# EAGLE board Final v5 (EAGLE 9.7.0)
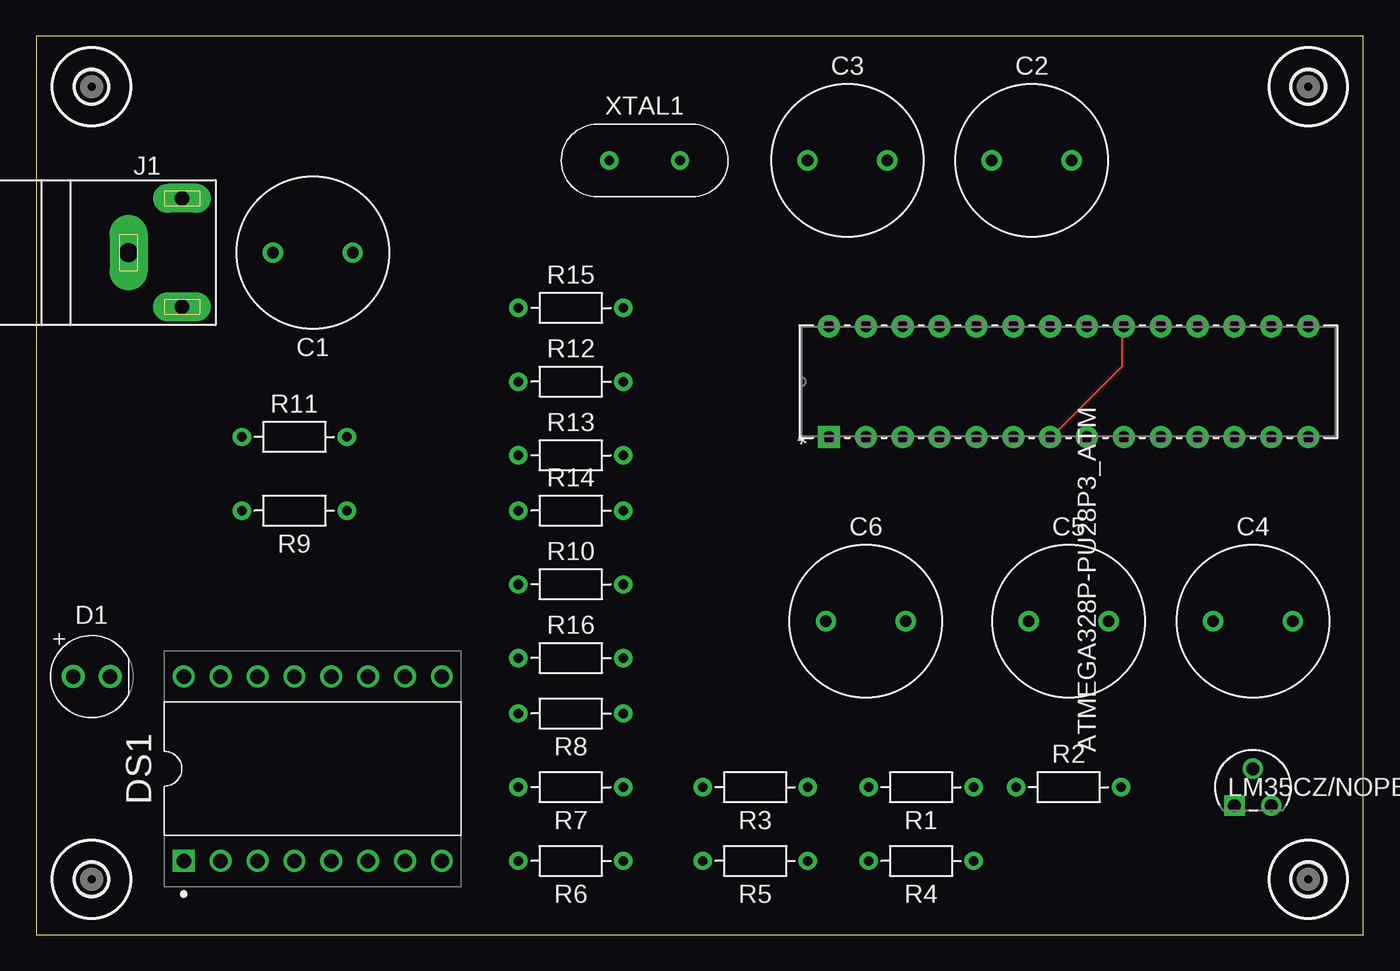
[diagram p0: board, top side]
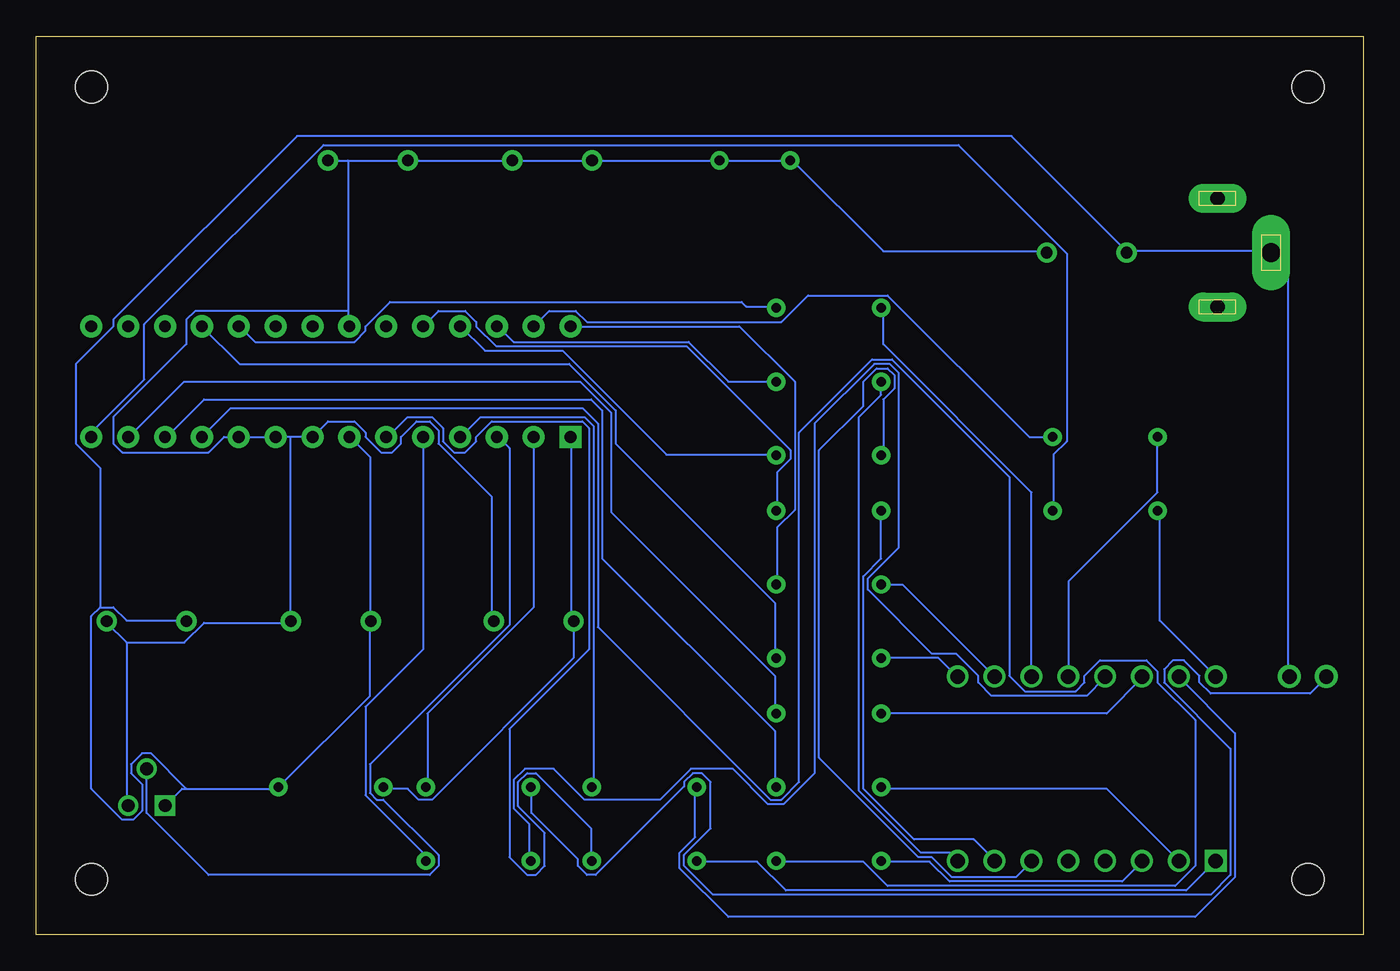
[diagram p1: board, bottom side, seen from below]

Size 91.42 x 61.9 mm. Coordinates in mm from the lower left corner, seen from the top.
Outline: 0,0 91.42,0 91.42,61.9 0,61.9 0,0
Copper layers (1*16): Top / Bottom
Stack-up Default Layer Stack: Top User Defined 0.035mm / Dielectric-1 User Defined 1.5mm / Bottom User Defined 0.035mm
Design rules "default": minimum track width 6mil, minimum drill 0.35mm, track to track 6mil, track to pad 6mil, pad to pad 6mil, via to via 6mil, smd to smd 6mil, copper to edge 40mil, drill to drill 6mil, minimum pad ring 10mil, minimum via ring 8mil, stop-mask expansion 4mil, vias tented up to drill 0mil, thermal gap 10mil

## Footprints (pad centres in the part's own frame; a part is rotated, then mirrored left to right if it is on the bottom)
CAPRD550W60D1025H1250B = drill 0.8 pad 1.4: 1 -2.75,0; 2 2.75,0
LEDGR254W60D565H860B_Y = drill 0.981 pad 1.581: 1 -1.27,0; 2 1.27,0
D*04-11SURKWA = drill 1 square: 1 0,0 | drill 1: 2 0,-2.54; 3 0,-5.08; 4 0,-7.62; 5 0,-10.16; 6 0,-12.7; 7 0,-15.24; 8 0,-17.78; 9 12.7,-17.78; 10 12.7,-15.24; 11 12.7,-12.7; 12 12.7,-10.16; 13 12.7,-7.62; 14 12.7,-5.08; 15 12.7,-2.54; 16 12.7,0
2,2 = hole 2.2: 0,0
PJRAN1X1U01X = drill 1.3 pad 2.6 long: 1 0,0 | drill 1 pad 2 long: 2 3.75,3.7; 3 -3.75,3.7
RESAD724W46L381D178B = drill 0.66 pad 1.26: 1 -3.62,0; 2 3.62,0
28P3_ATM = drill 0.813 pad 1.524 square: 1 0,0 | drill 0.813 pad 1.524: 2 0,-2.54; 3 0,-5.08; 4 0,-7.62; 5 0,-10.16; 6 0,-12.7; 7 0,-15.24; 8 0,-17.78; 9 0,-20.32; 10 0,-22.86; 11 0,-25.4; 12 0,-27.94; 13 0,-30.48; 14 0,-33.02; 15 7.62,-33.02; 16 7.62,-30.48; 17 7.62,-27.94; 18 7.62,-25.4; 19 7.62,-22.86; 20 7.62,-20.32; 21 7.62,-17.78; 22 7.62,-15.24; 23 7.62,-12.7; 24 7.62,-10.16; 25 7.62,-7.62; 26 7.62,-5.08; 27 7.62,-2.54; 28 7.62,0
Z03A = drill 0.889 pad 1.397 square: 1 -2.54,-2.54 | drill 0.889 pad 1.397: 2 -1.27,0; 3 0,-2.54
XTALRR488W45L1150T500H350B = drill 0.657 pad 1.257: 1 -2.44,0; 2 2.44,0

## Placement (x,y rotation side)
C1  [CAPRD550W60D1025H1250B]  19.05,46.99 180 top
C2  [CAPRD550W60D1025H1250B]  68.58,53.34 0 top
C3  [CAPRD550W60D1025H1250B]  55.88,53.34 0 top
C4  [CAPRD550W60D1025H1250B]  83.82,21.59 0 top
C5  [CAPRD550W60D1025H1250B]  71.12,21.59 0 top
C6  [CAPRD550W60D1025H1250B]  57.15,21.59 0 top
D1  [LEDGR254W60D565H860B_Y]  3.81,17.78 0 top
DS1  DA04-11SURKWA  [D*04-11SURKWA]  10.16,5.08 90 top
H1  MOUNT-HOLE2.2  [2,2]  87.63,58.42 0 top
H2  MOUNT-HOLE2.2  [2,2]  3.81,58.42 0 top
H3  MOUNT-HOLE2.2  [2,2]  3.81,3.81 0 top
H4  MOUNT-HOLE2.2  [2,2]  87.63,3.81 0 top
J1  PJRAN1X1U01X  [PJRAN1X1U01X]  6.35,46.99 270 top
R1  [RESAD724W46L381D178B]  60.96,10.16 180 top
R2  [RESAD724W46L381D178B]  71.12,10.16 0 top
R3  [RESAD724W46L381D178B]  49.53,10.16 180 top
R4  [RESAD724W46L381D178B]  60.96,5.08 180 top
R5  [RESAD724W46L381D178B]  49.53,5.08 180 top
R6  [RESAD724W46L381D178B]  36.83,5.08 180 top
R7  [RESAD724W46L381D178B]  36.83,10.16 180 top
R8  [RESAD724W46L381D178B]  36.83,15.24 180 top
R9  [RESAD724W46L381D178B]  17.78,29.21 180 top
R10  [RESAD724W46L381D178B]  36.83,24.13 0 top
R11  [RESAD724W46L381D178B]  17.78,34.29 0 top
R12  [RESAD724W46L381D178B]  36.83,38.1 0 top
R13  [RESAD724W46L381D178B]  36.83,33.02 0 top
R14  [RESAD724W46L381D178B]  36.83,29.21 0 top
R15  [RESAD724W46L381D178B]  36.83,43.18 0 top
R16  [RESAD724W46L381D178B]  36.83,19.05 0 top
U2  ATMEGA328P-PU28P3_ATM  [28P3_ATM]  54.61,34.29 90 top
U3  LM35CZ/NOPBZ03A  [Z03A]  85.09,11.43 0 top
XTAL1  HC49  [XTALRR488W45L1150T500H350B]  41.91,53.34 0 top

## Library data of the parts
C1 = Capacitor; CATEGORY: Capacitor
C2-C6 = Tutorial - Fusion 360; CATEGORY: Capacitor
D1 = Library
DS1 = Display_LED; CATEGORY: DISPLAY; COLOR: Hyper Red (AlGaInP); CONFIGURATION: Common Anode; DESCRIPTION: 10 mm (0.4 inch) Dual Digit Numeric Display in Common Anode Configuration; DIGIT: Dual Digit; MANUFACTURER: Kingbright; MPN: DA04-11SURKWA; OPERATING_TEMP: -40°C to +85 °C; PART_STATUS: Active; ROHS_COMPLIANT: COMPLIANT; SERIES: -; SUB-CATEGORY: LED; THERMALLOSS: 0.075 W; TYPE: 7 Segment
H1-H4 = holes
J1 = Connectors; CREATED_BY: PCBLayout.com; DIGIKEY_PART_NUMBER: PJRAN1X1U01X-ND; MANUFACTURER: Switchcraft Inc.; MPN: PJRAN1X1U01X
R1-R16 = Resistor; CATEGORY: Resistor; SUB-CATEGORY: Fixed
U2 = ATMega328P-PU; COPYRIGHT: Copyright (C) 2022 Ultra Librarian. All rights reserved.; MANUFACTURER_PART_NUMBER: ATMEGA328P-PU; MFR_NAME: Microchip
U3 = LM35CZNOPB; COPYRIGHT: Copyright (C) 2022 Ultra Librarian. All rights reserved.; MANUFACTURER_PART_NUMBER: LM35CZ/NOPB; MFR_NAME: Texas Instruments; TYPE: LM35CAZ
XTAL1 = Frequency-Source; CATEGORY: Frequency-Source; SUB-CATEGORY: Crystal-2Pin

## Nets
GND: C1.1 C2.1 C2.2 C3.1 C3.2 C4.2 C5.2 C6.2 U2.8 U2.9 U2.10 U2.22 U3.3 XTAL1.1 XTAL1.2
N$1: U2.3 U3.2
N$3: C6.1 R2.1 U2.1
N$4: R1.1 U2.2
N$5: D1.1 R1.2
N$7: C1.2 C4.1 C5.1 D1.2 J1.1 R2.2 U2.7 U2.20 U3.1
N$8: R3.1 U2.4
N$9: R4.1 U2.5
N$10: R5.1 U2.6
N$11: R6.1 U2.11
N$12: R7.1 U2.12
N$13: R8.1 U2.13
N$14: R9.1 U2.14
N$15: DS1.15 R3.2
N$16: DS1.13 R4.2
N$17: DS1.1 R5.2
N$18: DS1.3 R6.2
N$19: DS1.2 R7.2
N$20: DS1.14 R8.2
N$21: DS1.16 R9.2
N$22: DS1.10 R10.1
N$23: DS1.12 R11.1
N$24: DS1.8 R12.1
N$25: DS1.6 R13.1
N$26: DS1.7 R14.1
N$27: DS1.11 R15.1
N$28: DS1.9 R16.1
N$29: R10.2 U2.28
N$30: R11.2 U2.27
N$31: R12.2 U2.26
N$32: R13.2 U2.25
N$33: R14.2 U2.24
N$34: R15.2 U2.19
N$35: R16.2 U2.18

## Tracks (layer width: path | path; a pad name or v marks a point on that pad's centre or on a via)
GND
  Bottom 0.152: 85.19,20.12 85.19,8.99 U3.3 | 85.19,20.12 86.56,21.49 C4.2 | 85.19,20.12 81.23,20.12 79.86,21.49 73.91,21.49 C5.2 73.91,21.64 73.91,34.29 | C6.2 60.05,21.64 60.05,30.18 63.7,33.83 63.7,34.75 64.31,35.36 65.23,35.36 66.29,34.29 66.29,33.83 66.9,33.22 67.67,33.22 68.73,34.29 68.73,34.59 69.49,35.36 71.32,35.36 U2.8 73.91,34.29 | 73.91,34.29 U2.9 U2.10 78.49,34.29 79.55,33.22 85.5,33.22 86.11,33.83 86.11,35.66 81.08,40.69 81.08,42.37 80.47,42.98 69.95,42.98 | C1.1 21.95,47.09 33.07,47.09 39.32,53.34 XTAL1.1 XTAL1.2 C3.1 C3.2 C2.1 69.95,53.34 | C2.2 69.95,53.34 | 69.95,53.34 69.95,42.98 | 69.95,42.98 69.95,41.91 U2.22
N$1
  Bottom 0.152: U3.2 83.82,8.38 79.55,4.12 64.31,4.12 63.7,4.72 63.7,5.49 67.51,9.3 67.97,9.3 68.43,9.75 68.43,11.73 58.83,21.34 58.83,33.53 59.59,34.29 U2.3
N$3
  Bottom 0.152: R2.1 67.36,10.06 65.84,10.06 65.08,9.3 64.16,9.3 54.41,19.05 54.41,21.49 C6.1 54.41,21.64 54.56,21.79 54.56,34.29 U2.1
N$4
  Bottom 0.152: U2.2 57.15,22.55 64.47,15.24 64.47,10.21 R1.1
N$5
  Bottom 0.152: R1.2 57.3,10.06 57.3,8.38 54.1,5.18 54.1,4.72 53.49,4.12 52.88,4.12 46.79,10.21 46.79,10.52 46.18,11.12 45.57,11.12 44.96,10.52 44.96,7.31 46.79,5.49 46.79,4.72 44.81,2.74 10.52,2.74 9.14,4.12 9.14,12.8 13.72,17.37 13.72,18.29 13.11,18.9 12.34,18.9 11.28,17.83 11.28,17.37 10.52,16.61 3.66,16.61 2.59,17.68 D1.1
N$7
  Top 0.152: U2.20 74.83,41.91 74.83,39.17 69.95,34.29 U2.7
  Bottom 0.152: U2.7 69.8,34.29 68.43,32.92 68.43,21.64 C5.1 68.43,21.49 68.43,16.46 74.68,10.21 R2.2 74.83,10.06 81.08,10.06 | 81.08,10.06 81.38,10.06 U3.1 | 87.02,22.55 86.11,22.55 85.19,21.64 81.08,21.64 C4.1 | 87.02,22.55 87.63,21.95 87.63,10.06 85.5,7.92 84.73,7.92 84.12,8.53 84.12,10.36 84.89,11.12 84.89,11.73 84.12,12.5 83.52,12.5 81.08,10.06 | D1.2 5.18,17.83 5.18,45.87 6.25,46.94 J1.1 6.4,47.09 16.15,47.09 C1.2 16.31,47.09 24.23,55.02 73.46,55.02 86.11,42.37 86.11,41.91 88.7,39.32 88.7,33.83 87.02,32.16 87.02,22.55
N$8
  Bottom 0.152: R3.1 53.03,10.21 53.03,35.05 53.65,35.66 60.81,35.66 62.18,34.29 U2.4
N$9
  Bottom 0.152: U2.5 64.77,19.66 68.73,15.7 68.73,9.6 64.62,5.49 64.62,5.18 R4.1
N$10
  Bottom 0.152: R5.1 53.19,5.18 53.19,7.31 57,11.12 57.61,11.12 58.22,10.52 58.22,8.84 56.39,7.01 56.39,4.72 57,4.12 57.61,4.12 58.83,5.33 58.83,14.17 53.34,19.66 53.34,34.9 53.8,35.36 60.05,35.36 61.11,34.29 61.11,33.98 61.87,33.22 62.64,33.22 63.4,33.98 63.4,34.9 64.16,35.66 65.84,35.66 67.21,34.29 U2.6
N$11
  Bottom 0.152: U2.11 78.03,36.27 53.8,36.27 52.73,35.2 52.73,21.18 40.84,9.3 40.08,9.3 38.86,10.52 38.86,34.59 33.83,39.62 32.46,39.62 24.38,31.55 24.38,17.83 23.32,16.76 19.81,16.76 19.2,17.37 19.2,17.83 18.14,18.9 14.94,18.9 14.17,18.14 14.17,17.37 11.58,14.78 11.58,4.72 12.95,3.35 32.77,3.35 34.44,5.03 40.39,5.03 R6.1
N$12
  Bottom 0.152: R7.1 40.54,10.21 40.54,14.02 52.43,25.91 52.43,36.12 53.19,36.88 79.86,36.88 82.45,34.29 U2.12
N$13
  Bottom 0.152: R8.1 40.54,15.24 40.54,17.83 51.82,29.11 51.82,35.97 53.95,38.1 81.23,38.1 85.04,34.29 U2.13
N$14
  Bottom 0.152: U2.14 87.63,34.59 83.97,38.25 83.97,42.06 71.63,54.41 27.89,54.41 20.42,46.94 20.42,33.98 21.34,33.07 21.34,29.26 R9.1
N$15
  Bottom 0.152: R3.2 46.02,10.06 46.02,6.71 47.09,5.64 47.09,4.57 43.74,1.22 11.58,1.22 8.84,3.96 8.84,13.87 12.65,17.68 DS1.15
N$16
  Bottom 0.152: R4.2 57.45,5.18 57.45,7.62 58.52,8.69 58.52,10.67 57.76,11.43 55.78,11.43 53.65,9.3 48.46,9.3 46.33,11.43 43.43,11.43 41,8.99 39.93,8.99 37.8,11.12 37.8,35.2 33.68,39.32 32.61,39.32 32,38.71 32,26.67 34.14,24.54 34.14,23.77 29.72,19.35 28.04,19.35 26.52,17.83 26.52,17.37 25.6,16.46 19.05,16.46 17.83,17.68 DS1.13
N$17
  Bottom 0.152: DS1.1 12.19,3.05 39.78,3.05 41.76,5.03 45.87,5.03 R5.2
N$18
  Bottom 0.152: R6.2 33.07,5.03 29.87,5.03 28.5,3.66 16.61,3.66 15.24,5.03 DS1.3
N$19
  Bottom 0.152: DS1.2 17.68,10.06 33.07,10.06 R7.2
N$20
  Bottom 0.152: R8.2 17.68,15.24 15.24,17.68 DS1.14
N$21
  Bottom 0.152: DS1.16 14.02,21.64 14.02,29.11 R9.2
N$22
  Bottom 0.152: DS1.10 31.7,24.08 33.07,24.08 R10.1
N$23
  Bottom 0.152: R11.1 14.17,34.29 14.17,30.48 20.27,24.38 20.27,17.83 DS1.12
N$24
  Bottom 0.152: DS1.8 28.5,5.64 30.48,5.64 34.75,9.91 34.75,35.66 33.22,37.19 33.22,38.1 R12.1
N$25
  Bottom 0.152: R13.1 33.07,33.07 33.07,36.88 32.31,37.64 32.31,38.56 32.77,39.01 33.53,39.01 34.44,38.1 34.44,36.42 37.49,33.38 37.49,12.19 30.63,5.33 29.72,5.33 28.35,3.96 23.93,3.96 22.86,5.03 DS1.6
N$26
  Bottom 0.152: R14.1 33.22,29.11 33.22,25.91 34.44,24.69 34.44,10.06 30.94,6.55 26.82,6.55 25.45,5.18 DS1.7
N$27
  Bottom 0.152: DS1.11 22.86,30.48 33.07,40.69 33.07,43.13 R15.1
N$28
  Bottom 0.152: R16.1 29.26,19.05 28.04,17.83 DS1.9
N$29
  Bottom 0.152: U2.28 42.98,41.91 39.17,38.1 39.17,29.26 40.39,28.04 40.39,24.23 R10.2
N$30
  Bottom 0.152: R11.2 23.01,34.29 32.77,44.04 38.25,44.04 40.08,42.21 53.49,42.21 54.25,42.98 56.08,42.98 U2.27
N$31
  Bottom 0.152: R12.2 43.74,38.1 46.48,40.84 58.52,40.84 59.59,41.91 U2.26
N$32
  Bottom 0.152: R13.2 40.54,33.07 48.01,33.07 55.17,40.23 60.5,40.23 62.18,41.91 U2.25
N$33
  Bottom 0.152: U2.24 63.7,42.98 61.87,42.98 61.11,42.21 61.11,41.91 59.74,40.54 46.63,40.54 39.47,33.38 39.47,32.77 40.39,31.85 40.39,29.26 R14.2
N$34
  Bottom 0.152: R15.2 40.54,43.28 42.52,43.28 42.82,43.59 67.06,43.59 68.73,41.91 68.73,41.6 69.49,40.84 76.35,40.84 77.42,41.91 U2.19
N$35
  Bottom 0.152: U2.18 77.42,39.32 54.71,39.32 51.51,36.12 51.51,33.83 40.54,22.86 40.54,19.05 R16.2